# Altium PCB E-43 Inertial sensor.PcbDoc
Units mil, origin at the board's own origin, x right, y up, seen from the top; angles counter-clockwise.
Board outline 632.31 x 1518.5 mil, 2 copper layers (Top Layer, Bottom Layer); 14 components, 17 nets, 105 pads, 24 vias.
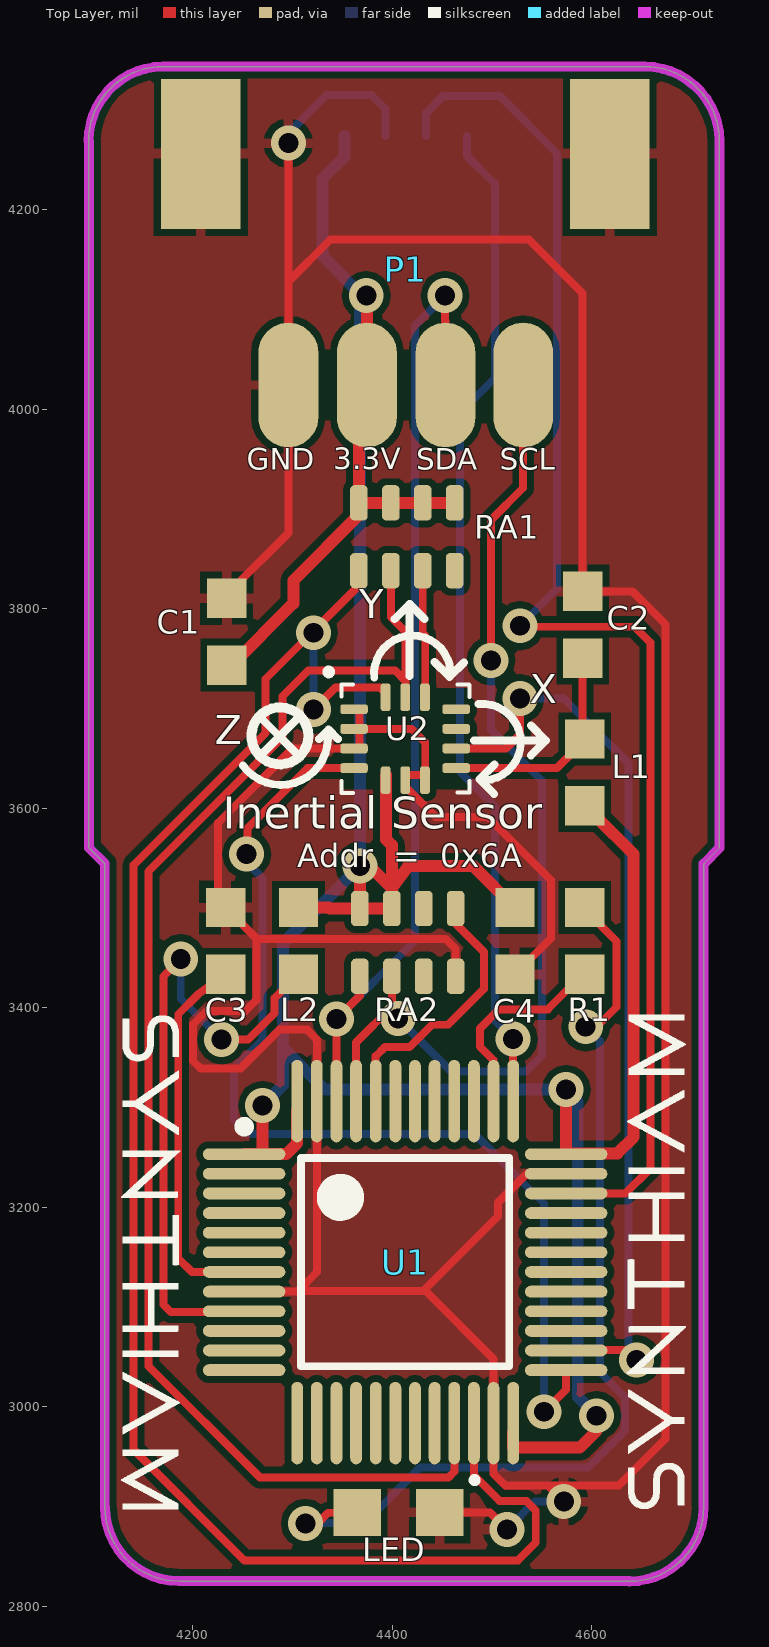
[diagram p0: Top Layer view]
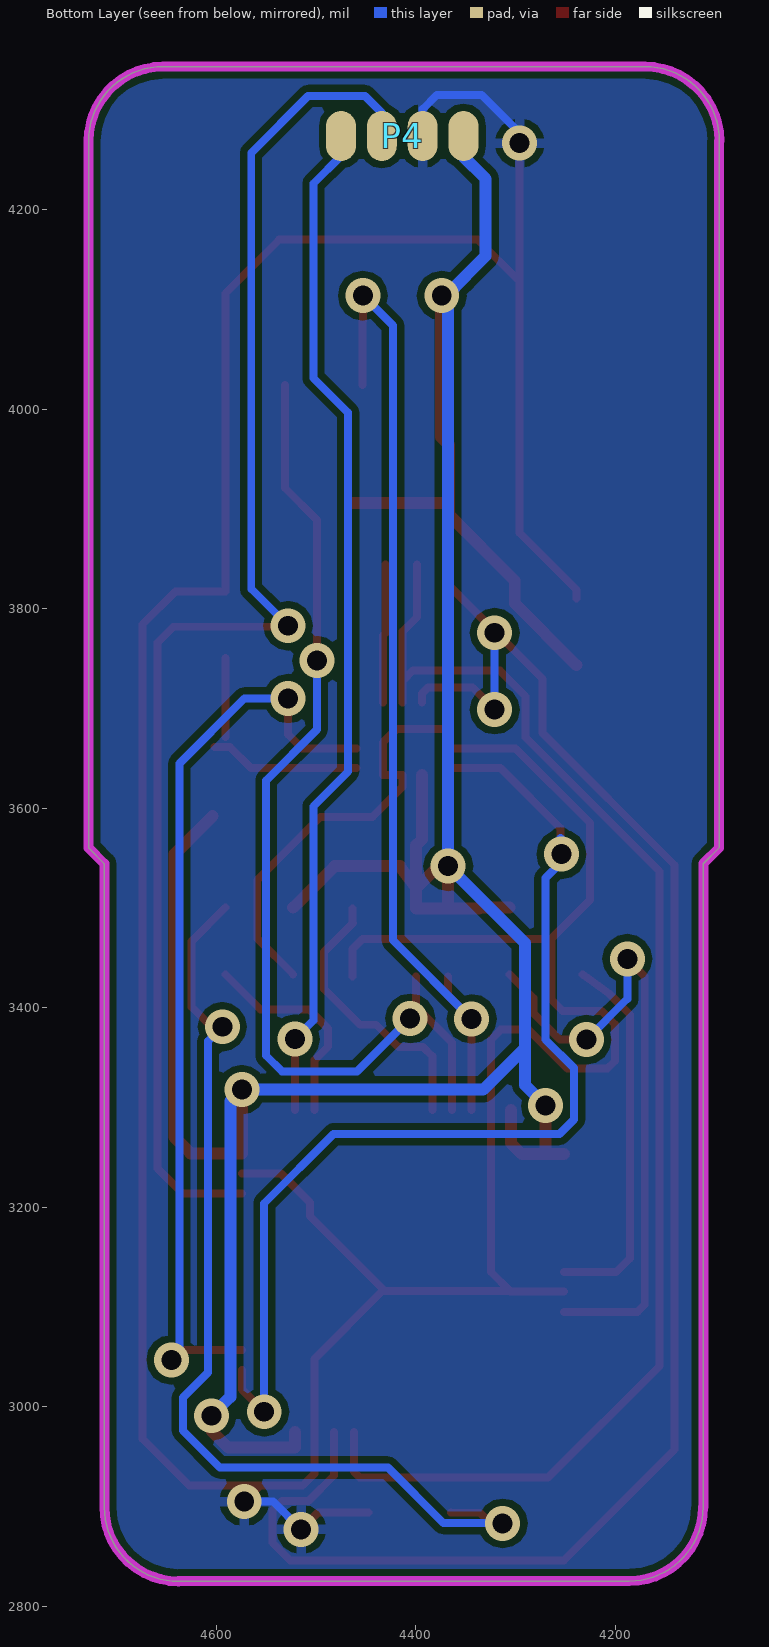
[diagram p1: Bottom Layer view, seen from below]

## Layer stack, top to bottom
Top Layer: signal copper 1.4
Dielectric: dielectric 12.6, FR-4, Dk 4.8
Bottom Layer: signal copper 1.4

## Board outline
4096,3560.31 4111.81,3544.5 4111.81,2899.5 4112,2899.5 ccw(c4186.31,2899.5) 4186.31,2825.19 4638,2825.19 4638,2825 ccw(c4638,2899.31) 4712.31,2899.31 4712.19,2899.31 4712.19,3544.5 4712.69,3544.5 4728,3560.31 4728,4269.19 ccw(c4653.69,4269.19) 4653.69,4343.5 4170,4343.5 ccw(c4170,4269.19) 4095.69,4269.19 4096,4269.19

## Design rules (kind name [scope] priority, off if disabled: settings)
Clearance [All] p1: gap=7
PolygonConnect [All] p1: connectstyle=Relief reliefconductorwidth=10 reliefentries=4 polygonreliefangle="90 Angle"
RoutingVias [All] p1: holewidth=20 width=35 viastyle="Through Hole" minholewidth=20 minwidth=35 maxholewidth=20 maxwidth=35
SMDNeckDown [All] p1: percent=125.000
SilkscreenOverComponentPads [All] p1: minsilkscreentomaskgap=10
SolderMaskExpansion [All] p1: expansion=4
Width Width_1 [InNet('VCC')] p1: maxlimit=50 minlimit=7 preferedwidth=12 minimp=50.000000 maximp=50.000000 favimp=50.000000
Width [All] p2: maxlimit=10 minlimit=7 preferedwidth=8 minimp=50.000000 maximp=50.000000 favimp=50.000000
27 further rules are at their usual default settings.

## Components (designator, comment, footprint, x,y, rotation, side; value= is the part's Value field where it differs from the comment)
C1 "0.1uF" "0603 TIGHT" 4234,3777 r270 top (schematic designator C5)
C2 "0.1uF" "0603 TIGHT" 4591,3784 r270 top (schematic designator C6)
C3 "Cap" "0603 TIGHT" 4233,3467 r90 top (schematic designator C9)
C4 "Cap" "0603 TIGHT" 4523,3467 r270 top (schematic designator C10)
L1 "Ferrite" "0603 TIGHT" 4593,3636 r90 top
L2 "Ferrite" "0603 TIGHT" 4306,3467 r90 top
LED "LED2" "0805 LED - TIGHT" 4433.86,2894 r0 top
P1 "JST 4-pin" "JST-PH 4-pin SMD" 4414,4026 r0 top
P4 "Not populated" "MINI PROG4" 4414,4274 r0 top
R1 "Res1" "0603 tight" 4593,3467 r270 top
RA1 "4.7k" "Resistor Array 4" 4414,3871 r180 top
RA2 "4.7k" "Resistor Array 4" 4415,3464.39 r180 top
U1 "STM32F030C8" LQFP48_M 4413,3145 r0 top
U2 "LSM6DS3US" LSM6DS3US 4422,3664 r0 top

## Footprints (in the part's own frame and the unit in brackets; to place one, negate y for a bottom-side part, rotate by r counter-clockwise, add the part's x,y. Pads: shape width x height; smd on the part's side, far side on the other; paste and mask are expansions set on the pad)
"0603 TIGHT" [mm]
  rect 1x1 smd: 1(-0.85,0) 2(0.85,0)
"0603 tight" [mm]
  rect 1x1 smd: 1(-0.85,0) 2(0.85,0)
"0805 LED - TIGHT" [mm] "SMT LED; 2 Flat Leads; Lite-Oon LTST-C170CKT"
  rect 1.2x1.2 smd: 1(-1.75,0) 2(0.35,0)
  silkscreen extent 1.21,0.8 1.26,0.85
"JST-PH 4-pin SMD" [mil]
  rect 80x150 smd: 0(-206,230) 0(204,230)
  oval 60x125 smd: 1(-118.11,-1.64) 2(-39.37,-1.64) 3(39.37,-1.64) 4(117.32,-1.64)
LQFP48_M [mm] "Thin QFP, 48-Leads, Body 7x7mm, Pitch 0.5mm, IPC Low Density"
  oval 2.1x0.3 smd: 1(-4.1,2.75) 2(-4.1,2.25) 3(-4.1,1.75) 4(-4.1,1.25) 5(-4.1,0.75) 6(-4.1,0.25) 7(-4.1,-0.25) 8(-4.1,-0.75) 9(-4.1,-1.25) 10(-4.1,-1.75) 11(-4.1,-2.25) 12(-4.1,-2.75) 25(4.1,-2.75) 26(4.1,-2.25) 27(4.1,-1.75) 28(4.1,-1.25) 29(4.1,-0.75) 30(4.1,-0.25) 31(4.1,0.25) 32(4.1,0.75) 33(4.1,1.25) 34(4.1,1.75) 35(4.1,2.25) 36(4.1,2.75)
  oval 0.3x2.1 smd: 13(-2.75,-4.1) 14(-2.25,-4.1) 15(-1.75,-4.1) 16(-1.25,-4.1) 17(-0.75,-4.1) 18(-0.25,-4.1) 19(0.25,-4.1) 20(0.75,-4.1) 21(1.25,-4.1) 22(1.75,-4.1) 23(2.25,-4.1) 24(2.75,-4.1) 37(2.75,4.1) 38(2.25,4.1) 39(1.75,4.1) 40(1.25,4.1) 41(0.75,4.1) 42(0.25,4.1) 43(-0.25,4.1) 44(-0.75,4.1) 45(-1.25,4.1) 46(-1.75,4.1) 47(-2.25,4.1) 48(-2.75,4.1)
  silkscreen extent -4.22,-2.65 2.65,3.57, body extent -3.5,-3.5 3.5,3.5, height 1.6
LSM6DS3US [mm]
  rrect50% 0.7x0.25 smd: 1(-1.532,0.897) 2(-1.532,0.397) 3(-1.532,-0.103) 4(-1.532,-0.603) 8(1.068,-0.603) 9(1.068,-0.103) 10(1.068,0.397) 11(1.068,0.897)
  rrect50% 0.25x0.7 smd: 5(-0.727,-0.908) 6(-0.227,-0.908) 7(0.273,-0.908) 12(0.273,1.202) 13(-0.227,1.202) 14(-0.727,1.202)
  silkscreen extent -2.28,-1.23 1.41,1.95
"MINI PROG4" [mil]
  oval 30x50 smd far side: 1(-61.74,0) 2(-20.84,0) 3(20.05,0) 4(60.95,0)
"Resistor Array 4" [mm]
  rrect50% 0.45x0.9 smd: 1(-1.235,0.834) 2(-1.235,-0.894) 3(-0.422,0.834) 4(-0.422,-0.894) 5(0.391,0.834) 6(0.391,-0.894) 7(1.204,0.834) 8(1.204,-0.894)

## Part data
C1 C2: library part Cap, "Capacitor"
C3 C4: "Capacitor"
L1 L2: library part Inductor, "Inductor"
LED: library part LED1, "Typical RED GaAs LED"
P1 P4: library part "Header 4", "Header, 4-Pin"
R1: "Resistor"
RA1 RA2: library part "Resistor Array 4"

## Free pads (board coordinates)
  round 225 on Bottom Solder: 0(4413,3144)

## Via types
v1: diameter 35, hole 20, Top Layer to Bottom Layer, tented both sides, 24 vias

## Nets (pads, with @x,y where several pads share a name; then routed paths per layer and width w, separated by ;. In a path a pad name is that pad's centre, name@x,y a point inside that pad or via, vN(x,y) a via of type N, cw(c..) or ccw(c..) an arc to the next point about the centre after c; other vN are vias at no path point)
GND: C1.1 C2.1 C3.2 C4.2 LED.2 P1.0 P1.1 P4.2 RA2.1 U1.8 U1.23 U1.35 U1.47 U2.1 U2.2 U2.3 U2.6 U2.7 | length 4721.1
  Top Layer w8: C1.1@4239,3810.46 4239,3819 4295.89,3875.89 P1.1 4295.89,4128 ; U1.8 4305,3115.47 4305.53,3116 ; v1(4295.89,4266.89) 4295.89,4128 ; U2.1@4367.18,3699.32 U2.2@4367.18,3679.63 ; 4432.29,3117.29 4506,3191 4506,3204.82 4535.18,3234 U1.35@4574.42,3234 ; LED.2 4498,2894 v1(4515,2877) ; RA2.1 4463.61,3459 4453.61,3469 4264.46,3469 4264,3469.46 ; C4.2 4559,3469.54 4559,3528 4495.53,3591.47 4443.53,3591.47 4413.44,3621.56 4413.44,3633.37 4433.12,3633.37 4433.12,3666 4419.49,3679.63 U2.2@4367.18,3679.63 ; v1(4572,2905) 4556,2921 ; 4264,3469.46 4264,3408 4253,3397 4214,3397 4200.5,3383.5 4200.5,3346.5 4208,3339 4248,3339 4287,3378 4315,3378 4315.6,3377.4 4315.6,3377.03 4324.42,3368.22 4324.42,3134.89 4305.53,3116 ; 4264,3469.46 C3.2 4225.5,3507.96 4225.5,3585.5 4299.95,3659.95 4367.18,3659.95 U2.2@4367.18,3679.63 ; 4295.89,4128 4337.89,4170 4537,4170 4591,4116 C2.1 4640.96,3817.46 4674,3784.42 4674,2967.84 4627.16,2921 4556,2921 ; 4305.53,3116 4433.58,3116 4501.58,3048 4501.58,2932.84 4513.43,2921 4556,2921
  Bottom Layer w8: v1(4295.89,4266.89) 4295.89,4276.89 4334,4315 4379,4315 4393.16,4300.84 P4.2 ; v1(4515,2877) 4543,2905 v1(4572,2905)
INT1: U1.25 U2.4 | length 1085.3
  Top Layer w8: v1(4254,3554) 4255,3555 4255,3580 4315.26,3640.26 U2.4@4367.18,3640.26 ; v1(4552,2995) 4574.42,3017.42 U1.25
  Bottom Layer w8: v1(4254,3554) 4254,3569 4255,3570 4255,3545 4270,3530 4270,3368 4241.5,3339.5 4241.5,3288 4256,3273.5 4482.5,3273.5 4552,3204 v1(4552,2995)
INT2: U1.26 U2.9 | length 924.5
  Top Layer w8: U2.9@4459.7,3659.95 4513.95,3659.95 4528,3674 v1(4528,3710) ; U1.26@4574.42,3057 4634,3057 v1@4644,3047
  Bottom Layer w8: v1(4528,3710) 4572,3710 4637,3645 4637,3047.42 4637.42,3047 v1@4644,3047
  other v1: 4645,3047
NetC2_2: C2.2 L1.2 U2.8 | length 230.2
  Top Layer w8: U2.8@4459.7,3640.26 4565.26,3640.26 4586.46,3661.46 L1.2@4602,3661.46 ; L1.2@4591,3671.46 C2.2
NetC3_1: C3.1 U1.7 | length 378.9
  Top Layer w8: C3.1 4205.42,3413.42 4185.5,3393.5 4185.5,3148.66 4199.16,3135 U1.7@4251.58,3135
NetL2_1: L2.1 U1.9 | length 648.9
  Top Layer w8: v1(4188,3449) 4170.5,3431.5 4170.5,3102.5 4178,3095 U1.9@4251.58,3095 ; v1(4229,3368) 4255.51,3368 4282.05,3394.54 4282.05,3409.58 L2.1
  Bottom Layer w8: v1(4188,3449) 4188,3409 v1(4229,3368)
NetLED_1: LED.1 R1.1 | length 990.2
  Top Layer w8: v1@4312.5,2883.5 4326.02,2883.68 4335.71,2893.62 LED.1 ; R1.1@4591,3500.47 4625,3466.47 4625,3401 4605,3381 v1(4594,3381)
  Bottom Layer w8: v1@4312.5,2883.5 4372.5,2883.5 4428,2939 4596.5,2939 4633.5,2976 4633.5,3009.42 4608.5,3034.42 4608.5,3366.5 v1(4594,3381)
  other v1: 4313,2883
NetRA1_3: RA1.3 U2.12 | length 139
  Top Layer w8: RA1.3@4430.61,3844.18 4430.61,3775.51 4433.12,3773 U2.12@4433.12,3706.21
NetRA2_2: RA2.2 U1.44 | length 283.7
  Top Layer w8: U1.44@4383.47,3297.42 4383.47,3351.47 4392.78,3360.78 4417.53,3360.78 4439.75,3383 4456,3383 4492,3419 4492,3456 4463,3485 4463.61,3485 RA2.2
SCL_1: P1.4 RA2.5 U1.45 | length 1042.1
  Top Layer w8: U1.45@4363.79,3297.42 4363.79,3365.21 v1@4399.61,3401.04 ; RA2.5 v1@4399.61,3401.04 ; v1(4405.72,3389.28) v1@4399.61,3401.04 ; v1@4499,3749 4499,3889 4531.32,3921.32 P1.4
  Bottom Layer w8: v1(4405.72,3389.28) 4459,3336 4534,3336 4550,3352 4550,3628 4499,3679 v1@4499,3749
  other v1: 4499,3748
SCL_2: RA1.5 U1.21 U2.13 | length 1404.7
  Top Layer w8: RA1.5@4398.61,3844.18 4398.61,3791.83 4413.44,3777 U2.13@4413.44,3706.21 ; 4413.44,3727.56 4403,3738 4315.83,3738 4289.83,3712 4289.83,3671.05 4155.5,3536.71 4155.5,3041 4267.5,2929 4456.29,2929 4462.21,2934.93 U1.21@4462.21,2974.58
SDA_1: P1.3 RA2.7 U1.46 | length 1004
  Top Layer w8: U1.46@4344.1,3297.42 v1(4344.1,3388.84) 4367.61,3412.35 RA2.7 ; v1(4453,4114) 4453,4088.37 4453.37,4088 P1.3
  Bottom Layer w8: v1(4344.1,3388.84) 4423,3467.73 4423,4084 v1(4453,4114)
SDA_2: RA1.7 U1.22 U2.14 | length 1759.6
  Top Layer w8: v1(4321,3699) 4343,3721 4387.75,3721 4393.75,3715 U2.14@4393.75,3706.21 ; RA1.7@4366.61,3844.18 4366.61,3823.23 4273.16,3729.78 4273.16,3675.59 4140.5,3542.93 4140.5,2957.2 4251.69,2846 4525.9,2846 4543.9,2864 4543.9,2896 4534.4,2905.5 4507.71,2905.5 4481.9,2931.32 U1.22@4481.9,2974.58
  Bottom Layer w8: v1(4321,3699) v1(4321,3776)
SWDCLK: P4.4 U1.37 | length 1024.6
  Top Layer w8: U1.37@4521.27,3297.42 v1(4521.27,3368.68)
  Bottom Layer w8: P4.4 4474.95,4254.05 4502.82,4226.18 4502.82,4031.38 4468,3996.55 4468,3636.7 4502.82,3601.88 4502.82,3387.13 v1(4521.27,3368.68)
SWDIO: P4.3 U1.34 | length 1433.9
  Top Layer w8: v1(4528,3783) 4529,3782 4643,3782 4659,3766 4659,3239 4634,3214 U1.34@4574.42,3214
  Bottom Layer w8: P4.3 4434.05,4297.05 4451,4314 4508,4314 4565,4257 4565,3820 v1(4528,3783)
VCC: C1.2 C4.1 L1.1 L2.2 P1.2 P4.1 RA1.2 RA1.4 RA1.6 RA1.8 RA2.6 RA2.8 U1.1 U1.24 U1.36 U1.48 U2.5 | length 3428.9
  Top Layer w12: C1.2@4239,3743.54 4300.85,3805.39 4300.85,3828.24 4366.61,3894 4366.61,3964 4374.63,3972.02 P1.2 v1@4374.63,4109.13 ; U1.1 4293.73,3253.27 4304.73,3264.27 U1.48@4304.73,3297.42 ; U1.1@4270,3253.27 v1(4270,3302) ; L2.2 4336,3500.46 4336.9,3499.57 RA2.8 ; RA1.8 RA1.6 RA1.4 RA1.2 ; U2.5@4393.75,3633.37 4393.75,3568.86 4399.61,3563 4399.61,3520 ; U1.24@4521.27,2974.58 4521.27,2959 4588,2959 4605,2976 v1(4605,2991) ; C4.1 4481.46,3542 4416,3542 4399.61,3520 ; v1(4574.42,3318) 4574.42,3254 4625.73,3254 4642,3270.27 4642,3554 L1.1@4603.73,3592.27 ; RA2.8 v1(4367.61,3542) 4377.61,3542 4399.61,3520 ; RA2.8 RA2.6 4399.61,3520
  Bottom Layer w12: v1(4270,3302) 4290.5,3322.5 4290.5,3360 ; 4352,4131.24 v1@4367.61,4115.63 ; P4.1 4352.26,4253.26 4330,4231 4330,4153.76 4367.61,4116.15 v1@4367.61,4115.63 ; v1@4374,4111 4372.24,4111 v1@4367.61,4115.63 ; v1(4605,2991) 4586,3010 4586,3306.42 v1(4574.42,3318) 4332.5,3318 4290.5,3360 ; 4290.5,3360 4290.5,3464.89 v1(4367.61,3542) v1@4367.61,4115.63
  other v1: 4374,4114
WHITE: R1.2 U1.38 | length 213
  Top Layer w8: U1.38@4501.58,3297.42 4501.58,3347.42 4488,3361 4488,3379.31 4507.19,3398.5 4555.96,3398.5 R1.2@4591,3433.54
pads on no net: RA1.1 RA2.3 RA2.4 U1.2 U1.3 U1.4 U1.5 U1.6 U1.10 U1.11 U1.12 U1.13 U1.14 U1.15 U1.16 U1.17 U1.18 U1.19 U1.20 U1.27 U1.28 U1.29 U1.30 U1.31 U1.32 U1.33 U1.39 U1.40 U1.41 U1.42 U1.43 U2.10 U2.11

## Polygon pours and split planes (outlines as drawn)
GND on Bottom Layer "btm-pour" (solid, pour order 11): 4096,3560.31 4111.81,3544.5 4111.81,2899.5 4112,2899.5 ccw(c4186.31,2899.5) 4186.31,2825.19 4638,2825.19 4638,2825 ccw(c4638,2899.31) 4712.31,2899.31 4712.19,2899.31 4712.19,3544.5 4728,3560.31 4728.77,4266.45 ccw(c4654.45,4266.45) 4654.45,4340.77 4169.55,4340.77 ccw(c4169.55,4266.45) 4095.23,4266.45 4096,4251
GND on Top Layer "Top-pour" (solid, pour order 2): 4096,3560.31 4111.81,3544.5 4111.81,2899.5 4112,2899.5 ccw(c4186.31,2899.5) 4186.31,2825.19 4638,2825.19 4638,2825 ccw(c4638,2899.31) 4712.31,2899.31 4712.19,2899.31 4712.19,3544.5 4728,3560.31 4728.77,4264.45 ccw(c4654.45,4264.45) 4654.45,4338.77 4170.55,4341.77 ccw(c4170.55,4267.45) 4096.23,4267.45 4096,4261

## Keep-outs
Keep-Out Layer:
  lines w10: 4095.69,4269.19 cw(c4170,4269.19) 4170,4343.5 4653.69,4343.5 cw(c4653.69,4269.19) 4728,4269.19 4728,3560.31 4712.69,3544.5 ; 4096,4269.19 4096,3560.31 4111.81,3544.5 4111.81,2899.5 ; 4112,2899.5 ccw(c4186.31,2899.5) 4186.31,2825.19 4638,2825.19 ; 4638,2825 ccw(c4638,2899.31) 4712.31,2899.31 ; 4712.19,2899.31 4712.19,3544.5

## Other copper
Top Layer:
  pour cut-out: 4349,3721 4477,3721 4477,3619 4413,3618 4349,3619

## Silkscreen, mask and mechanical layers (free items; w line width, h text height)
Top Overlay:
  drawing of 4538 lines, arcs and shapes, not listed
  text "GND" at 4254,3932 h37
  text "3.3V" at 4340.67,3932.25 h37
  text "SDA" at 4424.33,3932 h37
  text "SCL" at 4508,3932 h37
  text "Y" at 4367,3781 h50
  text "X" at 4538,3696 h50
  text "Z" at 4222.06,3654.85 h50
  text "Inertial Sensor" at 4230,3569 h55
  text "Addr  =  0x6A" at 4305,3533 h40
Bottom Solder:
  text ":)" at 4383,4226 h150 r270